# EAGLE board stepper_power (EAGLE 7.2.0)
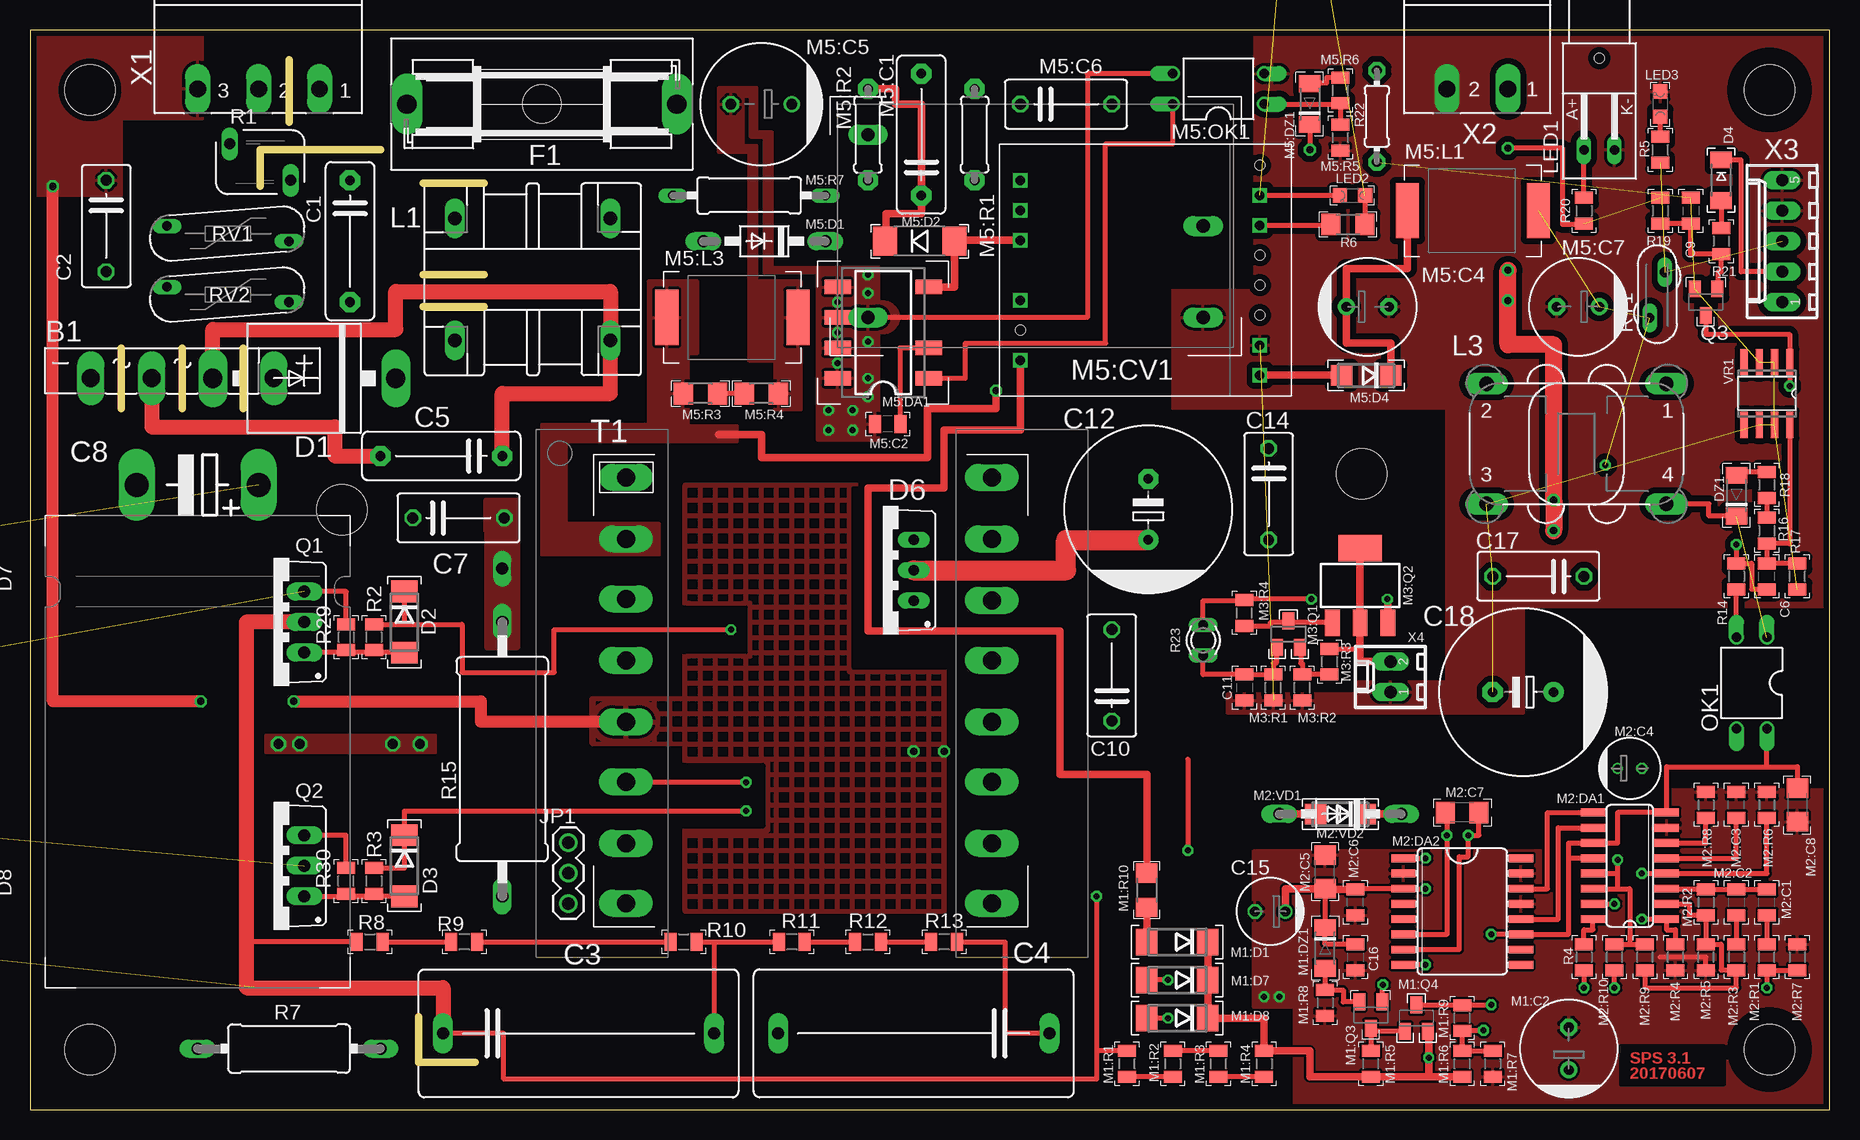
[diagram p0: board, top side]
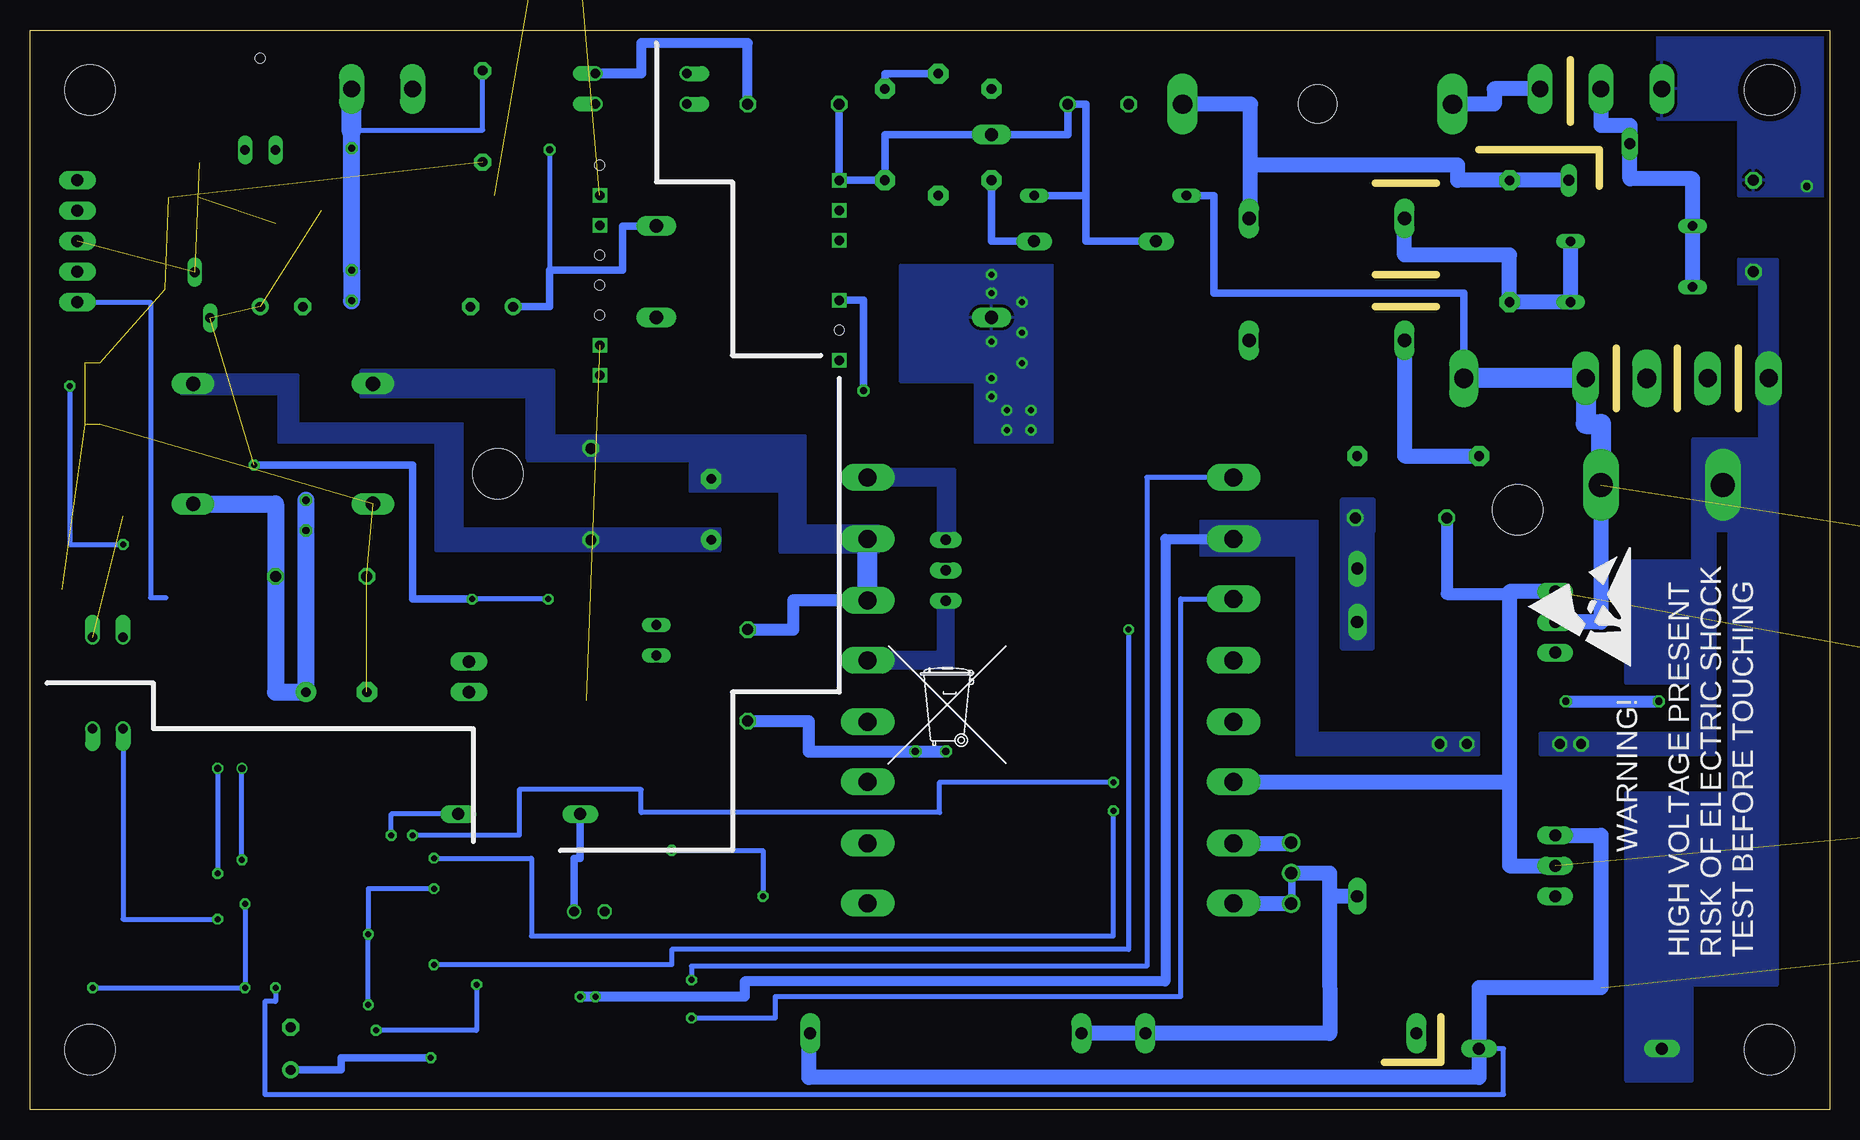
[diagram p1: board, bottom side, seen from below]

Size 150 x 90 mm. Coordinates in mm from the lower left corner, seen from the top.
Outline: 0,0 150,0 150,90 0,90 0,0
Copper layers (1*16): Top 0.035mm / dielectric 1.5mm / Bottom 0.035mm
Design rules "default *": minimum track width 10mil, minimum drill 0.5mm, track to track 8mil, track to pad 8mil, pad to pad 8mil, via to via 8mil, smd to smd 8mil, copper to edge 20mil, drill to drill 8mil, minimum pad ring 0.1mm, minimum via ring 8mil, stop-mask expansion 0.1mm, vias tented up to drill 0.5mm, thermal gap 10mil
Net classes: 1 power: clearance 0.305 mm to class 0, clearance 0.305 mm; 2 power++: clearance 0.5 mm
Holes 4.2 mm at 5,5 5,85 145,85 145,5 26,50 111,53
Holes 3.2 mm at -39,31 -37,73
tRestrict: area 141.6,81.6 to 148.4,88.4; area 141.6,1.6 to 148.4,8.4; 13 lines
Milling: 11 lines

## Footprints (pad centres in the part's own frame; a part is rotated, then mirrored left to right if it is on the bottom)
GBU4S = drill 1.499 long: + 7.62,0; - -7.62,0; AC1 2.54,0; AC2 -2.54,0
C102-043X133 = drill 0.8 pad 1.676 octagon: 1 -5.08,0; 2 5.08,0
C075-042X103 = drill 0.914 octagon: 1 -3.81,0; 2 3.81,0
C225-108X268 = drill 1 pad 1.676 long: 1 -11.303,0; 2 11.303,0
C0805 = smd 1 x 1.5: 1 -1.077,0; 2 1.077,0
EB25H = drill 2 long: + -5.08,0; - 5.08,0
E5-13 = drill 0.8 pad 1.676: + -2.54,0 | drill 0.8 pad 1.676 octagon: - 2.54,0
E2,5-6E = drill 0.8: + -1.27,0 | drill 0.8 octagon: - 1.27,0
P6-15-1 = drill 1.6 long: A 7.62,0; C -7.62,0
DO214AA = smd 1.8 x 2.2: A 2.55,0; C -2.55,0
MINIMELF = smd 1.4 x 1.8: A 1.7,0; C -1.7,0
TO220ABS = drill 0.9 long: 1 -2.54,-2.54; 2 0,-2.54; 3 2.54,-2.54
SOD57-10 = drill 1 long: A 5.08,0; C -5.08,0
SOD80C = smd 1.4 x 1.8: A 1.7,0; C -1.7,0
SH22,5A = drill 1.6 pad 2.54 long: 1 -11.252,0; 2 11.252,0 | hole 3.2: 0,0
1X03 = drill 1.016: 1 0,0; 2 2.54,0; 3 5.08,0
MFE = drill 1.118 long: 1 6.477,-5.08; 2 6.477,5.08; 3 -6.477,5.08; 4 -6.477,-5.08
82721K = drill 1.194 long: 1 7.493,5.004; 2 -7.493,5.004; 3 -7.493,-5.004; 4 7.493,-5.004
Q62902-B155 = drill 0.813 long: A 7.62,-1.27; K 7.62,1.27 | hole 0.813: 0,0
CHIPLED_0805 = smd 1.2 x 1.2: A 0,-1.05; C 0,1.05
E3,5-8 = drill 0.8 pad 1.422: + -1.778,0 | drill 0.8 pad 1.422 octagon: - 1.778,0
SOT23-BEC = smd 1 x 1.4: B -0.95,-1.1; C 0,1.1; E 0.95,-1.1
R0805 = smd 1 x 1.5: 1 -1.077,0; 2 1.077,0
R1206 = smd 1.6 x 1.803: 1 -1.422,0; 2 1.422,0
E2-5 = drill 0.6: + -1.016,0 | drill 0.6 octagon: - 1.016,0
C1206 = smd 1.6 x 1.8: 1 -1.4,0; 2 1.4,0
SO16 = smd 0.66 x 2.032: 1 -4.445,-3.073; 2 -3.175,-3.073; 3 -1.905,-3.073; 4 -0.635,-3.073; 5 0.635,-3.073; 6 1.905,-3.073; 7 3.175,-3.073; 8 4.445,-3.073; 9 4.445,3.073; 10 3.175,3.073; 11 1.905,3.073; 12 0.635,3.073; 13 -0.635,3.073; 14 -1.905,3.073; 15 -3.175,3.073; 16 -4.445,3.073
SO16L = smd 0.66 x 2.032: 1 -4.445,-4.902; 2 -3.175,-4.902; 3 -1.905,-4.902; 4 -0.635,-4.902; 5 0.635,-4.902; 6 1.905,-4.902; 7 3.175,-4.902; 8 4.445,-4.902; 9 4.445,4.902; 10 3.175,4.902; 11 1.905,4.902; 12 0.635,4.902; 13 -0.635,4.902; 14 -1.905,4.902; 15 -3.175,4.902; 16 -4.445,4.902
DO41-10 = drill 1 long: A 5.08,0; C -5.08,0
DO214AC = smd 1.8 x 1.7: A 2.05,0; C -2.05,0
SOT23 = smd 1 x 1.4: 1 -0.95,-1.1; 2 0.95,-1.1; 3 0,1.1
SOT223 = smd 1.219 x 2.235: 1 -2.311,-3.099; 2 0,-3.099; 3 2.311,-3.099 | smd 3.6 x 2.2: 4 0,3.099
E5-10,5 = drill 0.9: + -2.54,0 | drill 0.9 octagon: - 2.54,0
VSK-S1 = drill 1.1 long: AC1 0,15.24; AC2 0,0; COM 27.94,0; VDC 27.94,7.62
MELF-MLL41 = smd 2 x 2.4: A 2.879,0; C -2.879,0
DIP8_1 = smd 1.2 x 2.2: 1 -3.81,-3.8; 2 -1.27,-3.8; 4 3.81,-3.8; 5 3.81,3.8; 6 1.27,3.8; 7 -1.27,3.8; 8 -3.81,3.8
PLOKSCIAS = smd 1.93 x 4.6: 1 -5.334,0; 2 5.588,0
DIL04 = drill 0.8 pad 1.27 offset: 1 -1.27,-3.81; 2 1.27,-3.81; 3 1.27,3.81; 4 -1.27,3.81
0207/7 = drill 0.813 pad 1.676 octagon: 1 -3.81,0; 2 3.81,0
0309/12 = drill 0.813 long: 1 -6.35,0; 2 6.35,0
750841630 = drill 0.8 square: 1 0,0; 2 0,-2.5; 3 0,-5; 4 0,-10; 6 0,-15; 7 19.96,-16.25; 8 19.96,-13.75; 12 19.96,-3.75; 13 19.96,-1.25 | hole 0.8: 19.96,-11.25; 19.96,-8.75; 19.96,-6.25; 19.96,1.25; 0,-12.5
LP_D1.0 = drill 1 long: P$1 0,0
TO220BV = drill 1 long: D 0,-2.54; G -2.54,-2.54; S 2.54,-2.54
S05K275 = drill 0.914 long: 1 -1.524,-2.54; 2 1.524,2.54
0411/15 = drill 1 long: 1 -7.62,0; 2 7.62,0
P0817/22 = drill 1.016 long: 1 -11.43,0; 2 11.43,0
0204/7 = drill 0.8 pad 1.422 octagon: 1 -3.81,0; 2 3.81,0
P640 = drill 0.813 long: 1 -1.27,0; 2 1.27,0
X40 = drill 0.813 long: 1 0,0; 2 3.81,-1.27
TABLETE_10 = drill 0.8 long: 1 -5.08,0; 2 5.08,-1.27
ETD-39-K-H-16P = drill 1.5 pad 1.93 long: 1 6.5,40; 2 6.5,34.873; 3 6.5,29.873; 4 6.5,24.746; 5 6.5,19.619; 6 6.5,14.619; 7 6.5,9.492; 8 6.5,4.492; 9 37,4.492; 10 37,9.492; 11 37,14.619; 12 37,19.619; 13 37,24.746; 14 37,29.746; 15 37,34.873; 16 37,40
SO-08 = smd 0.6 x 2.2: 1 -1.905,-2.6; 2 -0.635,-2.6; 3 0.635,-2.6; 4 1.905,-2.6; 5 1.905,2.6; 6 0.635,2.6; 7 -0.635,2.6; 8 -1.905,2.6
MSTBA3 = drill 1.4 long: 1 -5.08,5.08; 2 0,5.08; 3 5.08,5.08
MSTBA2 = drill 1.4 long: 1 -2.54,5.08; 2 2.54,5.08
6410-05 = drill 1.016 long: 1 -5.08,0; 2 -2.54,0; 3 0,0; 4 2.54,0; 5 5.08,0
6410-02 = drill 1.016 long: 1 -1.27,0; 2 1.27,0

## Placement (x,y rotation side)
B1  GBU8K  [GBU4S]  12.7,60.96 0 top
C1  0.1/400V  [C102-043X133]  26.67,72.39 270 top
C2  2200/3kV  [C075-042X103]  6.35,73.66 270 top
C3  1,0uFx275V  [C225-108X268]  45.72,6.35 0 top
C4  1,0uFx275V  [C225-108X268]  73.66,6.35 180 top
C5  0.1/400V  [C102-043X133]  34.29,54.48 180 top
C6  0.1  [C0805]  144.78,44.45 90 top
C7  1n  [C075-042X103]  35.72,49.33 0 top
C8  330,0x450V  [EB25H]  13.97,52.07 180 top
C9  10n  [C0805]  138.43,74.93 270 top
C10  2200/3kV  [C075-042X103]  90.17,36.2 90 top
C11  10n  [C0805]  101.22,35.18 270 top
C12  1000x50V  [E5-13]  93.22,50.04 90 top
C14  0.1  [C075-042X103]  103.25,51.31 270 top
C15  47x16V  [E2,5-6E]  103.38,16.51 180 top
C16  0.1  [C0805]  110.49,12.7 270 top
C17  0.1  [C075-042X103]  125.73,44.45 180 top
C18  1000x50V  [E5-13]  124.46,34.8 180 top
D1  P600K  [P6-15-1]  22.86,60.96 180 top
D2  10MQ100  [DO214AA]  31.21,40.64 270 top
D3  10MQ100  [DO214AA]  31.21,20.32 270 top
D4  BAS32  [MINIMELF]  140.97,77.47 270 top
D5  BAS32  [MINIMELF]  106,97 180 top  (outside the outline)
D6  MUR1620CTG  [TO220ABS]  71.12,44.96 90 top
D7  BYV27  [SOD57-10]  -5.08,43.18 270 top  (outside the outline)
D8  BYV27  [SOD57-10]  -5.08,17.78 270 top  (outside the outline)
DZ1  12V  [SOD80C]  142.24,51.18 90 top
F1  5A  [SH22,5A]  42.67,83.82 0 top
JP1  [1X03]  44.87,22.25 270 top
L1  MFE  [MFE]  41.91,69.22 0 top
L3  82721K  [82721K]  128.91,55.5 0 top
LED1  VOUT  [Q62902-B155]  130.81,87.63 270 top
LED2  12V  [CHIPLED_0805]  110.24,76.2 90 top
LED3  12V  [CHIPLED_0805]  135.89,83.82 0 top
M1:C2  100x35V  [E3,5-8]  128.27,5.08 90 top
M1:D1  10MQ100  [DO214AA]  95.63,13.97 180 top
M1:D7  10MQ100  [DO214AA]  95.63,10.79 180 top
M1:D8  10MQ100  [DO214AA]  95.63,7.62 180 top
M1:DZ1  12V  [SOD80C]  107.95,13.46 270 top
M1:Q3  BC817  [SOT23-BEC]  111.76,7.87 180 top
M1:Q4  BC807  [SOT23-BEC]  115.57,7.62 0 top
M1:R1  [R0805]  91.44,3.81 90 top
M1:R2  [R0805]  95.25,3.81 270 top
M1:R3  [R0805]  99.06,3.81 90 top
M1:R4  [R0805]  102.87,3.81 270 top
M1:R5  [R0805]  111.76,3.81 90 top
M1:R6  [R0805]  119.38,3.81 90 top
M1:R7  [R0805]  121.92,3.81 270 top
M1:R8  [R0805]  107.95,8.89 270 top
M1:R9  [R0805]  119.38,7.62 90 top
M1:R10  120  [R1206]  93.09,18.29 90 top
M2:C1  10n  [C0805]  144.78,17.27 90 top
M2:C2  10n  [C0805]  142.24,17.27 270 top
M2:C3  4700  [C0805]  142.24,25.4 90 top
M2:C4  10x63V  [E2-5]  133.35,28.45 0 top
M2:C5  1uF  [C1206]  107.95,19.81 90 top
M2:C6  0.1  [C0805]  110.49,17.27 90 top
M2:C7  1uF  [C1206]  119.38,24.77 180 top
M2:C8  1uF  [C1206]  147.32,25.4 270 top
M2:DA1  TL494CD  [SO16]  133.35,20.32 90 top
M2:DA2  IR2113S  [SO16L]  119.38,16.51 270 top
M2:R1  33k  [R0805]  144.78,12.7 90 top
M2:R2  1M  [R0805]  139.7,17.27 270 top
M2:R3  33k  [R0805]  142.24,12.7 270 top
M2:R4  20k  [R0805]  137.16,12.7 90 top
M2:R5  20k  [R0805]  139.7,12.7 90 top
M2:R6  10k  [R0805]  144.78,25.4 270 top
M2:R7  1k  [R0805]  147.32,12.7 270 top
M2:R8  2k  [R0805]  139.7,25.4 270 top
M2:R9  20k  [R0805]  134.62,12.7 90 top
M2:R10  20k  [R0805]  132.08,12.7 90 top
M2:VD1  UF4007  [DO41-10]  109.22,24.64 180 top
M2:VD2  10MQ100  [DO214AC]  109.22,24.64 180 top
M3:Q1  BC817  [SOT23]  104.9,39.62 0 top
M3:Q2  BCP52  [SOT223]  110.87,43.69 0 top
M3:R1  [R0805]  103.63,35.18 90 top
M3:R2  [R0805]  106.05,35.18 90 top
M3:R3  [R0805]  108.33,37.34 90 top
M3:R4  [R0805]  101.22,41.4 90 top
M5:C1  0.01x630V  [C102-043X133]  74.3,81.28 90 top
M5:C2  0.1  [C0805]  71.5,57.15 180 top
M5:C4  100x35V  [E3,5-8]  111.51,66.93 0 top
M5:C5  10.0x400V  [E5-10,5]  60.96,83.82 180 top
M5:C6  2200x3kV  [C075-042X103]  86.36,83.82 0 top
M5:C7  100x35V  [E3,5-8]  129.03,66.93 180 top
M5:CV1  VSK-S1-5V  [VSK-S1]  69.85,66.04 0 top
M5:D1  P6KE150  [DO41-10]  61.21,72.39 180 top
M5:D2  LL4007  [MELF-MLL41]  74.17,72.39 0 top
M5:D4  10MQ100  [DO214AC]  111.38,61.21 180 top
M5:DA1  TNY278G  [DIP8_1]  71.12,64.77 90 top
M5:DZ1  12V  [SOD80C]  106.68,83.82 90 top
M5:L1  1000uH  [PLOKSCIAS]  120.14,74.93 0 top
M5:L3  1000uH  [PLOKSCIAS]  58.42,66.04 0 top
M5:OK1  PC817  [DIL04]  99.06,85.09 90 top
M5:R1  100  [0207/7]  78.74,81.28 270 top
M5:R2  1k  [0207/7]  69.85,81.28 270 top
M5:R3  1k  [R1206]  55.88,59.69 0 top
M5:R4  1k  [R1206]  60.96,59.69 0 top
M5:R5  [R0805]  109.22,81.03 90 top
M5:R6  [R0805]  109.22,84.96 90 top
M5:R7  47  [0309/12]  59.94,76.2 0 top
M5:T2  [750841630]  82.55,77.47 0 top
OK1  PC817  [DIL04]  143.51,35.56 180 top
P1  [LP_D1.0]  39.37,45.09 90 top
Q1  IRF740  [TO220BV]  20.32,40.64 90 top
Q2  IRF740  [TO220BV]  20.32,20.32 90 top
Q3  BC817  [SOT23-BEC]  139.7,67.31 180 top
R1  S05K275  [S05K275]  19.18,78.99 270 top
R2  30R  [R0805]  28.67,39.37 270 top
R3  30R  [R0805]  28.67,19.05 270 top
R4  1k  [R0805]  129.54,12.7 270 top
R5  [R0805]  135.89,80.01 90 top
R6  2k  [R1206]  109.86,73.79 180 top
R7  0.1  [0411/15]  21.59,5.08 0 top
R8  [R0805]  28.32,13.97 0 top
R9  [R0805]  36.2,13.97 180 top
R10  [R0805]  54.48,13.97 0 top
R11  [R0805]  63.5,13.97 180 top
R12  [R0805]  69.85,13.97 0 top
R13  [R0805]  76.2,13.97 180 top
R14  [R0805]  142.24,44.45 270 top
R15  100  [P0817/22]  39.37,29.21 90 top
R16  [R0805]  144.78,48.26 270 top
R17  [R0805]  147.32,44.45 90 top
R18  [R0805]  144.78,52.07 270 top
R19  [R0805]  135.89,74.93 270 top
R20  [R0805]  129.54,74.93 270 top
R21  [R0805]  140.97,72.39 270 top
R22  10k  [0204/7]  112.27,82.8 270 top
R23  [P640]  97.79,39.12 270 top
R29  1k  [R0805]  26.36,39.38 90 top
R30  1k  [R0805]  26.34,19.05 90 top
RT1  [X40]  135,66 90 top
RV1  33  [TABLETE_10]  16.51,72.39 180 top
RV2  33  [TABLETE_10]  16.51,67.31 180 top
T1  [ETD-39-K-H-16P]  43.18,12.7 0 top
U$2  [TONNE_10.00]  73.66,31.75 0 bottom
U$3  [ESD_10.00]  16.51,36.83 90 bottom
VR1  TL431  [SO-08]  144.78,59.69 180 top
X1  MAIN  [MSTBA3]  19.05,90.17 180 top
X2  MSTBA2  [MSTBA2]  120.65,90.17 180 top
X3  Stepper Control  [6410-05]  146.05,72.39 90 top
X4  COOLER  [6410-02]  113.41,36.07 90 top

## Library data of the parts
B1 = rectifier
C1-C12 C14-C18 M1:C2 M2:C1-M2:C8 M5:C1 M5:C2 M5:C4-M5:C7 M5:R1 M5:R2 R7 R15 R22 = rcl
D1-D8 DZ1 M1:D1 M1:D7 M1:D8 M1:DZ1 M2:VD1 M2:VD2 M5:D1 M5:D2 M5:D4 M5:DZ1 = diode
F1 = fuse
JP1 = SparkFun
L1 L3 M5:L1 M5:L3 = inductors
LED1-LED3 = led
M1:Q3 M3:Q1 Q3 = transistor-npn
M1:Q4 M3:Q2 = transistor-pnp
M1:R1-M1:R9 M2:R1-M2:R10 M3:R1-M3:R4 M5:R5 M5:R6 R2-R5 R8-R14 R16-R21 R29 R30 = rcl; PACK_TYPE: SMD
M1:R10 M5:R3 M5:R4 R6 = rcl; PACK_TYPE: SMD; VENT_CODE: ---
M2:DA1 M5:DA1 = linear
M2:DA2 = ir
M5:CV1 RT1 = descreet
M5:OK1 OK1 = optocoupler
M5:R7 = rcl; PACK_TYPE: DIP; VENT_CODE: ---
M5:T2 T1 = trafo
P1 = misc
Q1 Q2 = transistor-power
R1 = varistor
R23 RV1 RV2 = ptc-ntc
U$2 U$3 = logo
VR1 = v-reg
X1 X2 = con-phoenix-508
X3 X4 = connectors

## Nets
12VDC: M3:Q2.3 M3:R4.2 M5:C7.+ M5:L1.2 R23.1 RT1.1
12VOUT: R5.1 RT1.2 X3.3
!PS_START: D4.C X3.2
+V [power++]: B1.+ C3.1 C8.+ D1.C D7.C M1:R1.2 M5:R7.1 Q1.D R8.1
AGND: B1.- C2.2 C8.- C15.- C16.2 M1:C2.- M1:R7.2 M1:R8.2 M2:C3.2 M2:C5.2 M2:C6.1 M2:C8.2 M2:DA1.7 M2:DA2.2 M2:DA2.13 M2:DA2.15 M2:R4.1 M2:R5.1 M2:R6.1 M2:R7.1 M2:R8.1 M5:L3.1 M5:R3.1 M5:T2.4 R7.1 T1.2
COM [power++]: C11.2 LED1.K LED3.C M3:R1.1 M3:R2.1 M5:C4.- M5:C6.2 M5:C7.- M5:CV1.COM M5:OK1.2 M5:R5.1 M5:T2.8 X2.2 X3.4 X3.5 X4.1
FB: M2:DA1.16 R4.1
GNDP [power++]: C9.1 C17.2 C18.- L3.3 Q3.E R17.1 R22.2 VR1.2 VR1.3 VR1.6 VR1.7
HO [power++]: D2.C M2:DA2.8 R2.1
LO [power]: D3.C M2:DA2.1 R3.1
M1:N$1 [power]: M1:D1.A M1:R10.1
M1:N$2: M1:Q3.B M1:R6.2 M1:R7.1 M1:R9.1
M1:N$3: M1:DZ1.A M1:Q3.E M1:R8.1
M1:N$4: M1:Q3.C M1:Q4.B M1:R5.2
M1:N$5: M1:R3.1 M1:R4.2
M1:N$6 [power]: M1:C2.+ M1:D1.C M1:D7.C M1:D8.C M1:Q4.E M1:R4.1 M1:R5.1 M1:R6.1
M1:N$8: M1:R1.1 M1:R2.2
M1:N$9: M1:R2.1 M1:R3.2
M2:N$1: M2:DA1.9 M2:DA2.14
M2:N$2: M2:DA1.10 M2:DA2.12
M2:N$3 [power++]: M2:C7.1 M2:DA2.7 M2:VD1.C M2:VD2.C
M2:N$4: M2:DA1.6 M2:R8.2
M2:N$5: M2:C3.1 M2:DA1.5
M2:N$6: M2:C1.1 M2:R1.2
M2:N$7: M2:C1.2 M2:C2.1 M2:DA1.3 M2:R2.1
M2:N$8: M2:DA1.2 M2:R2.2 M2:R3.2 M2:R5.2 M2:R9.1
M2:N$9: M2:C4.+ M2:DA1.13 M2:DA1.14 M2:R9.2 M2:R10.2
M2:N$10: M2:C2.2 M2:R3.1
M2:N$11: M2:DA1.15 M2:R1.1 M2:R7.2 M2:R10.1
M2:N$12: M2:C4.- M2:DA1.4 M2:R6.2
M3:N$1: M3:Q1.2 M3:R2.2 M3:R3.1
M3:N$2: M3:Q1.3 M3:Q2.1 M3:R4.1
M5:AGND: M5:C2.2 M5:C5.- M5:CV1.AC2 M5:DA1.5 M5:DA1.6 M5:DA1.7 M5:DA1.8 M5:L3.2 M5:OK1.3 M5:R4.2
M5:N$1: M5:C1.2 M5:R1.1
M5:N$2: M5:D1.C M5:R2.2
M5:N$3: M5:C5.+ M5:C6.1 M5:CV1.AC1 M5:D1.A M5:R1.2 M5:R7.2 M5:T2.1
M5:N$4: M5:C1.1 M5:D2.C M5:R2.1
M5:N$5: M5:C2.1 M5:DA1.2
M5:N$6: M5:D2.A M5:DA1.4 M5:T2.3
M5:N$7: M5:C4.+ M5:CV1.VDC M5:D4.C M5:DZ1.C M5:L1.1
M5:N$8: M5:DA1.1 M5:OK1.4
M5:N$10: M5:D4.A M5:T2.7
M5:N$13: M5:OK1.1 M5:R5.2 M5:R6.1
M5:N$15: M5:R3.2 M5:R4.1
M5:N$16: M5:DZ1.A M5:R6.2
N$1: OK1.2 R14.2
N$2: R11.1 R12.1
N$3: M5:T2.12 R6.2
N$4 [power++]: C3.2 C4.2 JP1.2 R10.2 R11.2 R15.1
N$5: C7.2 P1.P$1 R15.2
N$6: D3.A Q2.G R3.2 R30.1
N$7: D6.3 T1.16
N$8: D6.1 T1.13
N$9: C6.2 R16.2 R17.2 VR1.8
N$10 [power++]: DZ1.A R18.1
N$12: C10.2 C12.- C14.1 L3.2 T1.14 T1.15
N$13: C9.2 Q3.B R19.2 R21.2
N$14 [power++]: C12.+ C14.2 D6.2 L3.1
N$15: LED3.A R5.2
N$16: D2.A Q1.G R2.2 R29.1
N$17: D4.A R21.1
N$18: C11.1 M3:Q1.1 M3:R1.2 R23.2
N$19: R12.2 R13.2
N$20: JP1.1 T1.7
N$21: M3:Q2.2 M3:Q2.4 M3:R3.2 X4.2
N$22: JP1.3 T1.8
N$24: D5.C LED2.A R6.1
N$25: D5.A LED2.C M5:T2.13
N$26: R9.1 R10.1
N$27: R8.2 R9.2
N$28: LED1.A R20.1
N$29 [power++]: C1.2 L1.3 RV1.1 RV2.1
N$30 [power++]: C1.1 F1.2 L1.2 R1.2
N$31 [power++]: R1.1 RV1.2 RV2.2 X1.2
N$32 [power++]: F1.1 X1.1
N$33: C6.1 Q3.C R14.1 VR1.1
N$34: B1.AC2 C5.2 L1.4
N$36: R16.1 R18.2
N$37 [power]: C4.1 D8.A Q2.S R4.2 R7.2 R13.1 R30.2
N$43 [power++]: B1.AC1 C5.1 D1.A L1.1
OKE [power]: M2:DA1.1 M2:R4.2 OK1.3
PE [power++]: C2.1 C10.1 T1.5 X1.3
TRA [power]: M1:D8.A T1.3
TRB [power]: M1:D7.A T1.1
VB [power++]: C7.1 D7.A D8.C M2:C7.2 M2:DA2.6 Q1.S Q2.D R29.2 T1.6
VCONTR: X3.1
VCT [power]: M1:R10.2 M5:T2.6
VDD [power]: C15.+ C16.1 M1:DZ1.C M1:Q4.C M1:R9.2 M2:C5.1 M2:C6.2 M2:C8.1 M2:DA1.8 M2:DA1.11 M2:DA1.12 M2:DA2.3 M2:DA2.11 M2:VD1.A M2:VD2.A OK1.4
VOUT [power++]: C17.1 C18.+ DZ1.C L3.4 OK1.1 R19.1 R20.2 R22.1 X2.1

## Tracks (layer width: path | path; a pad name or v marks a point on that pad's centre or on a via)
12VDC  (via drill 0.5)  (3 unrouted)
  Top 0.406: v113.16,42.55 113.18,42.55 | v106.81,42.55 101.22,42.55 M3:R4.2 101.22,42.42 97.79,42.42 R23.1
  Top 0.61: 113.18,42.55 M3:Q2.3
  Bottom 0.406: v106.81,42.55 v113.16,42.55
  Bottom 0.61: v113.16,42.55 118.11,42.55 118.11,53.72 v131.32,53.72
12VOUT  (2 unrouted)
!PS_START
  Top 0.406: D4.C 142.62,79.17 142.62,69.85 X3.2
+V  (via drill 0.5)  (1 unrouted)
  Top 0.406: M1:R1.2 88.9,4.89 | 88.9,4.89 88.9,2.54 39.5,2.54 39.5,6.35 C3.1 | R8.1 18.03,13.97 | 96.52,29.21 v96.52,21.59 | v88.9,17.78 88.9,4.89
  Top 1.27: Q1.D 18.03,40.64 18.03,13.97 18.03,10.16 34.42,10.16 C3.1
  Bottom 0.406: v96.52,21.59 88.9,21.59 v88.9,17.78
  Bottom 0.61: D1.C 30.48,68.07 51.31,68.07 51.31,76.2 M5:R7.1
  Bottom 1.27: C8.+ 19.05,40.64 Q1.D
  Bottom 1.676: C8.+ 19.05,57.15 20.32,57.15 B1.+ D1.C
AGND  (via drill 0.5, 0.6, 0.8 pad 1.27)
  Top 0.406: M2:R5.1 139.7,12.7 135.89,12.7
  Top 0.61: v80.52,59.94 80.52,58.42 74.8,58.42 74.8,54.36 60.96,54.36 60.96,56.26 57.4,56.26
  Bottom 0.61: M5:T2.4 80.52,67.47 v80.52,59.94
  Bottom 0.813: v104.14,9.4 90.42,9.4 90.42,10.67 55.37,10.67 55.37,47.57 T1.2
  other vias: 22.48,30.48 30.23,30.48 20.7,30.48 32.51,30.48 102.87,9.4
  pour Bottom (no thermals): 4.32,70.87 7.62,70.87 7.62,68.83 5.84,68.83 5.84,55.88 11.43,55.88 11.43,45.72 17.02,45.72 17.02,35.56 11.43,35.56 11.43,31.37 24.13,31.37 24.13,29.59 9.53,29.59 9.53,48.26 8.38,48.26 8.38,26.42 17.02,26.42 17.02,2.41 11.43,2.41 11.43,10.41 4.32,10.41
  pour Top: 101.98,21.59 135.25,21.59 135.25,26.67 149.86,26.67 149.86,0 105.41,0 105.41,8.51 101.98,8.51
  pour Bottom (no thermals): 29.21,31.37 42.67,31.37 42.67,49.02 52.45,49.02 52.45,46.23 44.45,46.23 44.45,29.59 29.21,29.59
  pour Top: 19.68,31.24 33.78,31.24 33.78,29.72 19.68,29.72
  pour Top: 51.56,69.09 55.63,69.09 55.63,62.99 54.86,62.99 54.86,57.02 58.93,57.02 58.93,55.63 44.7,55.63 44.7,48.9 42.67,48.9 42.67,57.15 51.56,57.15
  pour Top (no thermals): 42.67,48.9 52.45,48.9 52.45,46.23 42.67,46.23
COM  (1 unrouted)
  Bottom 0.813: M5:C6.2 90.17,88.9 99.06,88.9 99.06,86.36 M5:OK1.2
  pour Top: 149.86,41.91 128.27,41.91 128.27,58.42 95.25,58.42 95.25,68.33 102.11,68.33 102.11,90.17 114.3,90.17 114.3,81.28 120.65,81.28 120.65,90.17 149.86,90.17
  pour Top (no thermals): 118.11,58.42 128.27,58.42 128.27,41.91 124.46,41.91 124.46,45.72 118.11,45.72
  pour Top (no thermals): 114.3,90.17 120.65,90.17 120.65,81.28 114.3,81.28
  pour Top: 99.82,34.67 110.62,34.67 110.62,35.69 118.11,35.69 118.11,45.72 124.46,45.72 124.46,33.02 99.82,33.02
FB
  Top 0.406: R4.1 129.54,14.99 130.28,14.99 M2:DA1.16
GNDP  (10 unrouted)
HO  (via drill 0.5)
  Top 0.406: R2.1 31.21,40.45 | 31.21,40.45 D2.C | v116.33,12.06 M2:DA2.8 | v58.42,40.01 43.69,40.01 43.69,36.45 36,36.45 36,40.45 31.21,40.45
  Bottom 0.406: v116.33,12.06 96.52,12.06 96.52,13.34 58.42,13.34 v58.42,40.01
LO  (via drill 0.5)
  Top 0.406: R3.1 31.21,20.13 D3.C 31.21,24.89 v59.69,24.89 | M2:DA2.1 v116.33,20.95
  Bottom 0.406: v116.33,20.95 108.2,20.95 108.2,14.48 59.69,14.48 v59.69,24.89
M1:N$1
  Top 0.61: M1:D1.A 93.09,15.6 M1:R10.1
M1:N$2  (via drill 0.5)
  Top 0.406: M1:R7.1 M1:R6.2 M1:R9.1 121.16,6.54 v121.16,6.6 | M1:Q3.B 112.71,10.41 v112.78,10.41
  Bottom 0.406: v112.78,10.41 112.78,6.6 v121.16,6.6
M1:N$3
  Top 0.406: M1:DZ1.A M1:R8.1 109.47,9.97 109.47,8.97 M1:Q3.E
M1:N$4
  Top 0.406: M1:R5.2 M1:Q3.C 111.76,6.52 M1:Q4.B
M1:N$5
  Top 0.406: M1:R4.2 M1:R3.1
M1:N$6  (via drill 0.5)
  Top 0.61: 116.59,2.73 M1:R5.1 106.68,2.73 106.68,4.89 M1:R4.1 102.87,7.62 M1:D8.C M1:D7.C M1:D1.C | 116.59,2.73 M1:R6.1 | M1:Q4.E 116.59,6.52 v116.59,4.32 116.59,2.73
  Bottom 0.61: M1:C2.+ 124.08,3.3 124.08,4.32 v116.59,4.32
M1:N$8
  Top 0.406: M1:R2.2 M1:R1.1
M1:N$9
  Top 0.406: M1:R3.2 M1:R2.1
M2:N$1
  Top 0.406: M2:DA2.14 126.49,18.41 126.49,24.77 M2:DA1.9
M2:N$2
  Top 0.406: M2:DA2.12 127.38,15.88 127.38,23.5 M2:DA1.10
M2:N$3  (via drill 0.5)
  Top 0.406: M2:DA2.7 119.13,13.34 119.13,21.08 119.89,21.08 v119.89,22.86 120.78,22.86 M2:C7.1 120.78,24.13
  Top 0.61: M2:VD2.C M2:VD1.C
  Bottom 0.406: M2:VD1.C 119.89,24.64 v119.89,22.86
M2:N$4
  Top 0.406: M2:DA1.6 139.7,22.23 M2:R8.2
M2:N$5
  Top 0.406: M2:DA1.5 142.24,20.95 M2:C3.1
M2:N$6
  Top 0.406: M2:C1.1 M2:R1.2
M2:N$7
  Top 0.406: M2:C1.2 M2:C2.1 M2:R2.1 139.7,18.41 M2:DA1.3
M2:N$8
  Top 0.406: M2:DA1.2 138.3,17.14 138.3,16.2 M2:R2.2 M2:R5.2 140.97,13.78 140.97,11.62 M2:R3.2 142.24,10.16 134.62,10.16 M2:R9.1
M2:N$9  (via drill 0.5)
  Top 0.406: M2:DA1.13 132.33,19.68 | M2:DA1.14 132.33,18.41 | 132.33,18.41 132.33,19.68 | M2:R10.2 133.35,13.78 | 133.35,13.78 M2:R9.2 | 132.33,19.68 v132.33,20.83 | 132.33,18.41 133.35,18.41 133.35,13.78
  Bottom 0.406: v132.33,20.83 M2:C4.+
M2:N$10
  Top 0.406: M2:C2.2 M2:R3.1
M2:N$11  (via drill 0.5)
  Top 0.406: M2:R7.2 M2:R1.1 v144.78,10.16 | v132.08,10.16 M2:R10.1 | M2:DA1.15 v132.08,17.14
  Bottom 0.406: v132.08,17.14 v132.08,10.16 v144.78,10.16
M2:N$12  (via drill 0.5)
  Top 0.406: M2:R6.2 144.78,19.68 M2:DA1.4 v134.37,19.68
  Bottom 0.406: M2:C4.- v134.37,19.68
M3:N$1
  Top 0.406: M3:R3.1 M3:R2.2 106.05,37.21 105.92,37.21 105.92,38.52 M3:Q1.2
M3:N$2
  Top 0.406: M3:Q2.1 104.9,40.59 | 104.9,40.59 M3:Q1.3 | 104.9,40.59 103.38,40.59 103.38,40.33 M3:R4.1
M5:AGND  (via drill 0.5)
  Top 0.406: M5:OK1.3 88.14,86.36 88.14,66.04 M5:CV1.AC2
  Top 0.61: M5:CV1.AC2 M5:DA1.6
  other vias: 69.85,69.6 69.85,68.07 69.85,64.01 69.85,60.96 69.85,59.44 66.55,58.29 68.58,58.29 66.55,56.64 68.58,56.64 67.31,62.23 67.31,64.77 67.31,67.31
  pour Top: 64.26,58.29 62.1,58.29 62.1,62.36 59.94,62.36 59.94,79.76 57.4,79.76 57.4,85.22 59.44,85.22 59.44,80.39 60.58,80.39 60.58,69.09 64.26,69.09
  pour Top: 59.31,85.22 60.58,85.22 60.58,81.53 61.85,81.53 61.85,70.23 70.74,70.23 70.74,67.31 arc-210 70.74,64.77 70.74,55.75 65.66,55.75 65.66,69.72 61.21,69.72 61.21,81.03 60.07,81.03 60.07,84.45 59.31,84.45
  pour Bottom: 64.77,70.36 77.47,70.36 77.47,60.71 71.25,60.71 71.25,55.63 64.77,55.63
M5:N$1
  Bottom 0.61: M5:C1.2 78.74,86.36 M5:R1.1
M5:N$2
  Bottom 0.61: M5:R2.2 69.85,72.39 M5:D1.C
M5:N$3
  Bottom 0.61: M5:R7.2 61.98,76.2 | 61.98,76.2 61.98,72.39 M5:D1.A | 61.98,76.2 61.98,83.82 M5:C5.+ 63.5,81.28 M5:CV1.AC1 78.74,81.28 M5:R1.2 M5:T2.1 M5:C6.1
M5:N$4
  Top 0.61: M5:R2.1 72.14,85.09 72.14,83.82 74.3,83.82 M5:C1.1 74.3,74.68 71.37,74.68 71.37,72.39 M5:D2.C
M5:N$5
  Top 0.406: M5:DA1.2 72.52,63.5 72.52,57.15 M5:C2.1
M5:N$6
  Top 0.61: 74.72,68.58 M5:DA1.4 77.05,68.58 M5:D2.A 77.05,72.47 M5:T2.3
M5:N$7  (via drill 0.6)
  Top 0.406: M5:DZ1.C v106.68,80.01
  Top 0.61: M5:D4.C 113.43,63.88 109.73,63.88 M5:C4.+ 109.73,70.1 114.81,70.1 M5:L1.1
  Bottom 0.406: v106.68,80.01 106.68,69.98
  Bottom 0.61: M5:C4.+ 106.68,66.93 106.68,69.98 100.58,69.98 100.58,73.66 M5:CV1.VDC
M5:N$8
  Top 0.406: M5:DA1.1 77.98,60.96 77.98,63.88 89.66,63.88 89.66,80.52 95.25,80.52 M5:OK1.4
M5:N$10
  Top 0.61: M5:T2.7 M5:D4.A
M5:N$13
  Top 0.406: M5:R5.2 M5:R6.1 109.22,83.82 M5:OK1.1
M5:N$15
  Top 0.406: M5:R4.1 M5:R3.2
M5:N$16
  Top 0.406: M5:R6.2 108.08,86.04 108.08,85.6 106.68,85.6 M5:DZ1.A
N$1
  Top 0.406: OK1.2 R14.2
N$2
  Top 0.406: R11.1 R12.1
N$3
  Top 0.406: M5:T2.12 108.43,73.72 R6.2
N$4
  Top 0.406: 57.02,13.97 R11.2 | R10.2 57.02,13.97 | 57.02,13.97 C3.2
  Bottom 1.27: C4.2 C3.2 41.66,6.35 41.68,13.97 41.68,17.78 | 41.68,17.78 41.68,19.71 JP1.2 | R15.1 41.68,17.78
N$5
  pour Bottom (no thermals): 38.02,50.8 40.64,50.8 40.64,38.48 38.1,38.48 38.1,48.26 38.02,48.26
  pour Top (no thermals): 38.02,50.8 40.64,50.8 40.64,38.48 38.1,38.48 38.1,48.26 38.02,48.26
N$6
  Top 0.406: D3.A 26.67,17.77 | 26.67,17.77 28.67,17.78 | Q2.G 28.67,17.78 | 28.67,17.78 R3.2 | 26.67,17.77 26.67,17.98 R30.1
N$7
  pour Bottom (no thermals): 72.9,47.12 72.9,53.34 81.41,53.34 81.41,52.07 74.3,52.07 74.3,47.12
N$8
  pour Bottom (no thermals): 73.03,42.8 74.3,42.8 74.3,38.1 81.41,38.1 81.41,36.83 73.03,36.83
N$9
  Top 0.406: R17.2 C6.2 R16.2 146.69,47.18 VR1.8
N$10
  Top 0.406: R18.1 142.24,53.15 DZ1.A
N$12
  Bottom 1.016: C10.2 86.36,40.01 86.36,42.45 T1.14
  Bottom 1.676: T1.14 T1.15
  pour Bottom (no thermals): 79.25,48.64 85.34,48.64 85.34,56.13 106.3,56.13 106.3,61.59 122.43,61.59 122.43,59.44 108.58,59.44 108.58,54.1 95,54.1 95,51.56 87.5,51.56 87.5,46.48 79.25,46.48
N$13
  Top 0.406: R19.2 C9.2 138.43,71.31 R21.2 140.97,69.85 140.72,69.85 140.72,68.41 Q3.B
N$14
  Top 1.676: C12.+ 86.36,47.5 86.36,44.96 D6.2
  pour Bottom (no thermals): 92.46,48.39 113.92,48.39 113.92,57.15 127.64,57.15 127.64,61.21 137.41,61.21 137.41,59.69 129.29,59.69 129.29,55.63 116.2,55.63 116.2,46.61 92.46,46.61
N$15
  Top 0.406: R5.2 LED3.A
N$16
  Top 0.406: D2.A 28.67,38.09 28.67,38.1 | 28.67,38.1 26.42,38.1 26.36,38.1 | 26.36,38.1 Q1.G | 28.67,38.1 R2.2 | R29.1 26.36,38.1
N$17
  Top 0.406: D4.A R21.1
N$18
  Top 0.406: M3:Q1.1 103.89,38.52 103.89,37.21 103.63,37.21 M3:R1.2 C11.1 97.79,36.26 R23.2
N$19
  Top 0.406: R12.2 R13.2
N$20
  Bottom 1.27: T1.7 44.87,22.19 JP1.1
N$21
  Top 0.406: M3:R3.2 110.87,38.41 110.87,38.35
  Top 0.61: M3:Q2.4 M3:Q2.2 110.87,38.35 110.87,37.34 X4.2
N$22
  Bottom 1.27: T1.8 44.87,17.19 JP1.3
N$23
  Bottom 0.61: 44.83,19.81 44.83,17.14
N$24  (1 unrouted)
  Top 0.406: LED2.A 111.28,76.2 R6.1
N$25  (1 unrouted)
  Top 0.406: LED2.C 102.51,76.2 M5:T2.13
N$26
  Top 0.406: R9.1 R10.1
N$27
  Top 0.406: R8.2 R9.2
N$28
  Top 0.406: R20.1 LED1.A
N$29
  Bottom 1.27: RV1.1 RV2.1 C1.2 26.67,71.25 35.43,71.25 L1.3
N$30
  Bottom 1.016: L1.2 48.26,74.42
  Bottom 1.27: 48.26,74.42 48.26,78.74 | 48.26,78.74 48.26,83.82 F1.2 | 48.26,78.74 30.99,78.74 30.99,77.47 C1.1 R1.2
N$31
  Bottom 1.27: RV2.2 RV1.2 11.43,77.6 16.64,77.6 R1.1 16.64,82.04 19.05,82.04 X1.2
N$32
  Bottom 1.27: X1.1 27.94,85.09 27.94,83.82 F1.1
N$33  (via drill 0.5)
  Top 0.406: C6.1 143.51,43.37 143.51,45.53 R14.1 v142.24,47.12 | v146.69,60.33 VR1.1 146.69,64.64 139.7,64.64 Q3.C
  Bottom 0.406: v146.69,60.33 146.69,47.12 v142.24,47.12
N$34
  Top 1.27: B1.AC2 10.16,56.9 25.4,56.9 25.4,54.48 C5.2
  Bottom 1.27: L1.4 35.43,54.48 C5.2
N$36
  Top 0.406: R18.2 R16.1
N$37  (via drill 0.5)  (1 unrouted)
  Top 0.406: C4.1 81.28,6.35 81.28,13.97 R13.1 | R4.2 v129.54,10.16 | R30.2 26.34,22.86 Q2.S
  Bottom 0.406: v129.54,10.16 129.54,9.02 130.43,9.02 130.43,1.27 27.18,1.27 27.18,5.08 R7.2
  Bottom 1.016: C4.1 85.09,6.35
  Bottom 1.27: Q2.S 19.05,22.86 19.05,10.16 29.21,10.16 R7.2 29.21,2.67 85.09,2.67 85.09,6.35
N$43
  Top 1.27: D1.A 15.24,65.02 30.48,65.02 30.48,68.2 48.39,68.2 L1.1 48.39,59.69 39.37,59.69 C5.1
OKE  (via drill 0.5)
  Top 0.406: M2:R4.2 137.16,14.99 136.4,14.99 136.4,15.88 M2:DA1.1 v134.37,15.88
  Bottom 0.406: OK1.3 142.24,15.88 v134.37,15.88
PE  (via drill 0.6, 0.6 pad 0.5)
  Top 1.016: v14.22,34.04 1.91,34.04 v1.91,76.96 | T1.5 37.59,32.32 37.59,34.04 v21.97,34.04
  Bottom 1.016: v21.97,34.04 v14.22,34.04 | C10.1 85.09,32.38 85.09,29.84 v73.66,29.84
  other vias: 76.2,29.84
  pour Bottom: 0,90.04 14.35,90.04 14.35,82.55 7.62,82.55 7.62,76.2 0,76.2
  pour Top: 0,90.04 14.35,90.04 14.35,82.55 7.62,82.55 7.62,76.2 0,76.2
  pour Top (hatched): 54.61,52.07 76.2,52.07 76.2,16.51 54.61,16.51 54.61,30.48 46.86,30.48 46.86,34.29 54.61,34.29
TRA  (via drill 0.5)
  Top 0.406: v94.87,7.62 M1:D8.A
  Bottom 0.406: v94.87,7.62 87.88,7.62 87.88,9.4 54.1,9.4 54.1,42.57 T1.3
TRB  (via drill 0.5)
  Top 0.406: v94.87,10.79 M1:D7.A
  Bottom 0.406: v94.87,10.79 94.87,11.94 56.9,11.94 56.9,52.7 T1.1
VB  (via drill 0.5)  (2 unrouted)
  Top 0.406: M2:DA2.6 118.11,14.61 v118.11,22.86 118.11,24.13 M2:C7.2 | T1.6 59.69,27.32 v59.69,27.27 | R29.2 26.36,43.18 Q1.S
  Bottom 0.406: v59.69,27.27 74.17,27.27 74.17,24.77 99.06,24.77 99.06,26.67 109.22,26.67 109.22,22.86 v118.11,22.86
  Bottom 1.016: C7.1 31.91,43 26.67,43
  Bottom 1.27: Q1.S 26.67,43.18 26.67,43 26.67,27.32 | 26.67,27.32 26.67,20.32 Q2.D | T1.6 26.67,27.32
VCONTR
  Bottom 0.406: X3.1 139.95,67.31 139.95,42.67 138.68,42.67
VCT
  Top 0.61: M5:T2.6 82.55,56.64 76.2,56.64 76.2,51.82 69.85,51.82 69.85,39.88 85.85,39.88 85.85,27.94 93.09,27.94 M1:R10.2
VDD  (via drill 0.5)
  Top 0.406: v121.79,14.61 M2:DA2.11 128.27,14.61 128.27,20.95 | v116.33,18.41 M2:DA2.3 110.49,18.41 M2:C6.2 | 107.95,18.48 M2:C5.1 107.95,18.35 M1:DZ1.C 107.95,13.78 C16.1 | 144.78,28.57 136.42,28.57 M2:DA1.8 132.33,24.77 132.33,22.23 M2:DA1.11 128.27,22.23 128.27,20.95 | 144.78,28.57 OK1.4 | M2:DA1.12 128.27,20.95 | 144.78,28.57 147.32,28.57 M2:C8.1 | M1:Q4.C 119.38,8.72 | 119.38,8.72 M1:R9.2 | 119.38,8.72 v121.79,8.72
  Top 0.61: M2:C6.2 107.95,18.35 | M2:C5.1 104.65,18.41 C15.+ | M2:VD2.A M2:VD1.A
  Bottom 0.406: v116.33,18.41 121.79,18.41 v121.79,14.61 v121.79,8.72
  Bottom 0.61: C15.+ 104.65,20.95 104.14,20.95 M2:VD1.A
VOUT  (via drill 0.6)  (2 unrouted)
  Top 0.406: L3.4 138.94,50.5 139.95,50.5 139.95,49.48 DZ1.C | v123.19,80.14 127.76,80.14 127.76,73.79 129.54,73.79 R20.2
  Top 1.422: v123.19,69.98 123.19,63.75 127,63.75 v127,50.8 v127,48.26
  Bottom 0.406: 123.19,81.66 112.27,81.66 R22.1
  Bottom 1.422: v127,50.8 127,38.61 C18.+ 129.54,34.8 C17.1 129.54,50.49 L3.4 | 123.19,81.66 v123.19,80.14 v123.19,69.98 v123.19,67.44
  Bottom 1.676: 123.19,81.66 X2.1

## Text on the board
Top: SPS 3.1 | 20170607
bPlace: WARNING! | HIGH VOLTAGE PRESENT / RISK OF ELECTRIC SHOCK / TEST BEFORE TOUCHING
Measures: Jungtis 230VAC | Jungtis / VOUT | VOUT LED | 4x D3.2mm | Jungtis / Control | 2x D3.2mm